# EAGLE board prototype (EAGLE 7.2.0)
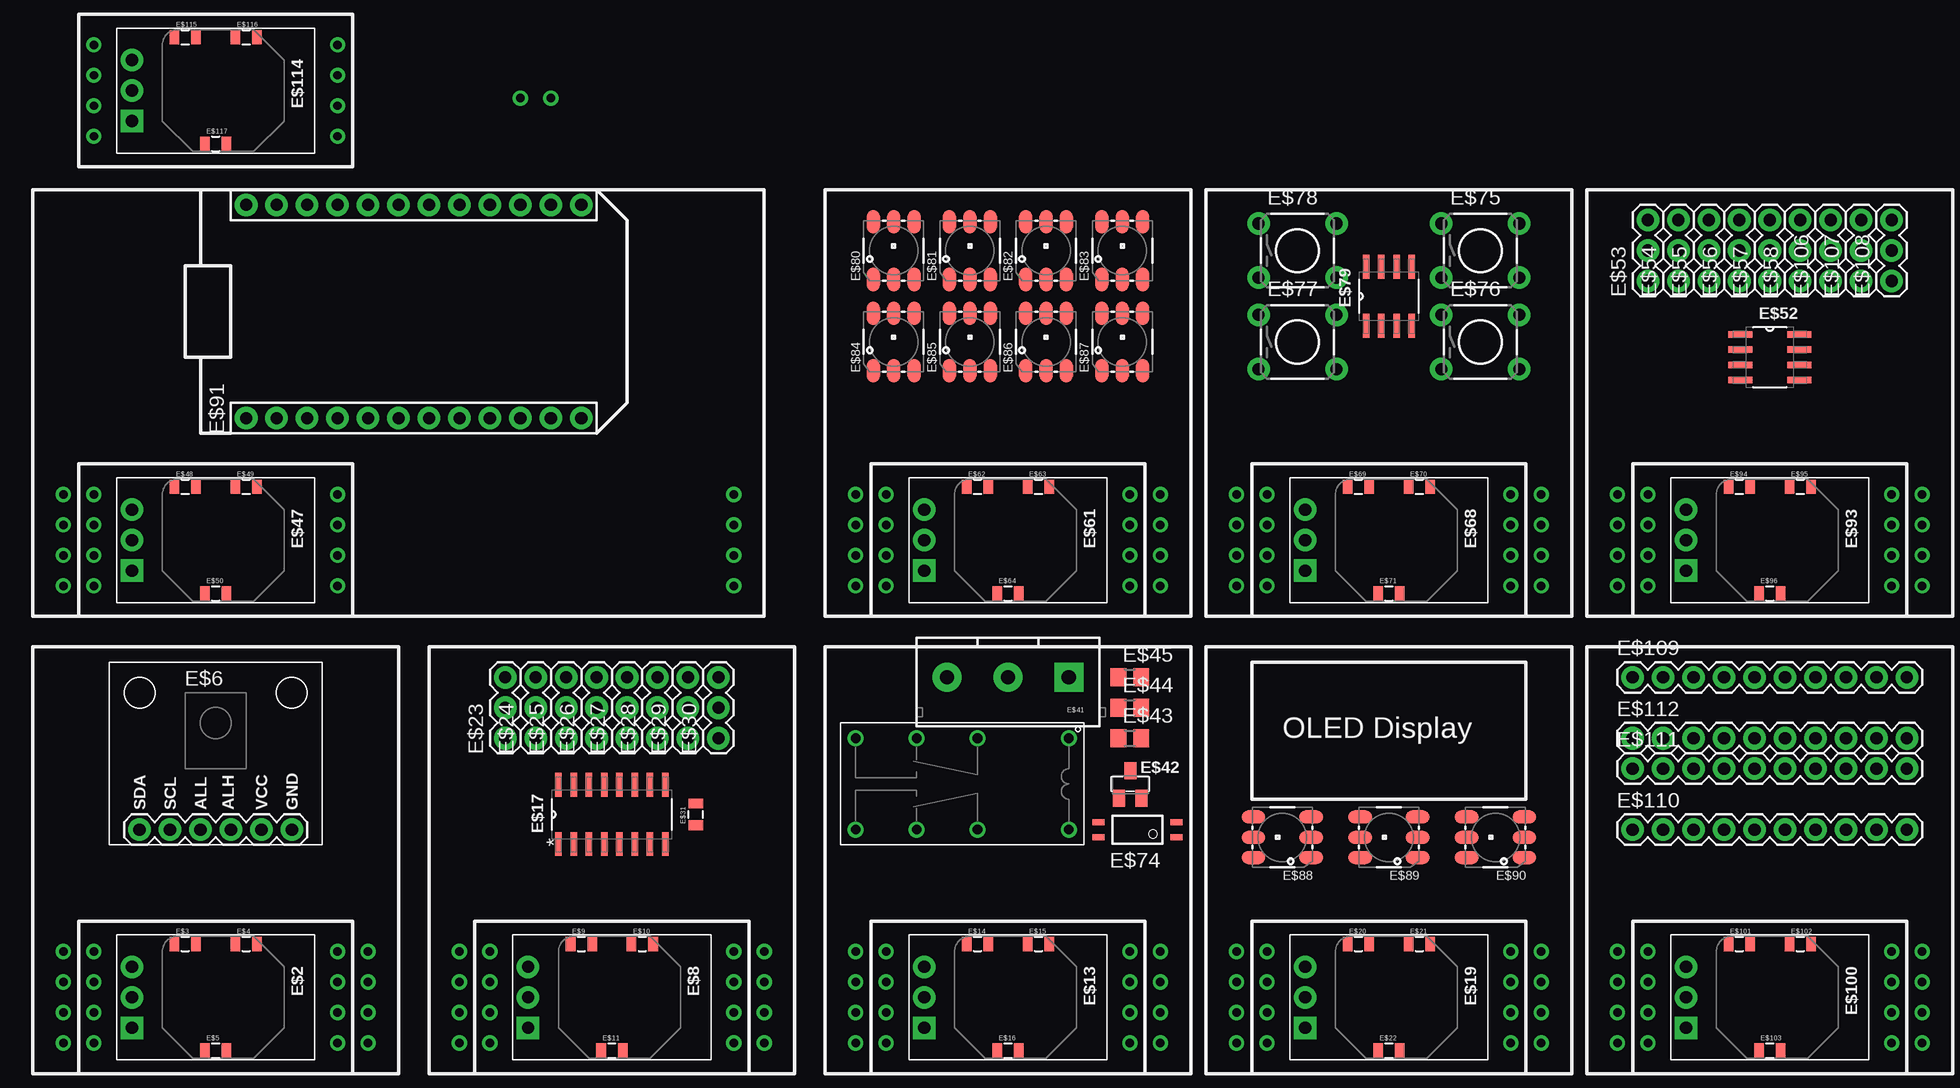
[diagram p0: board, top side]
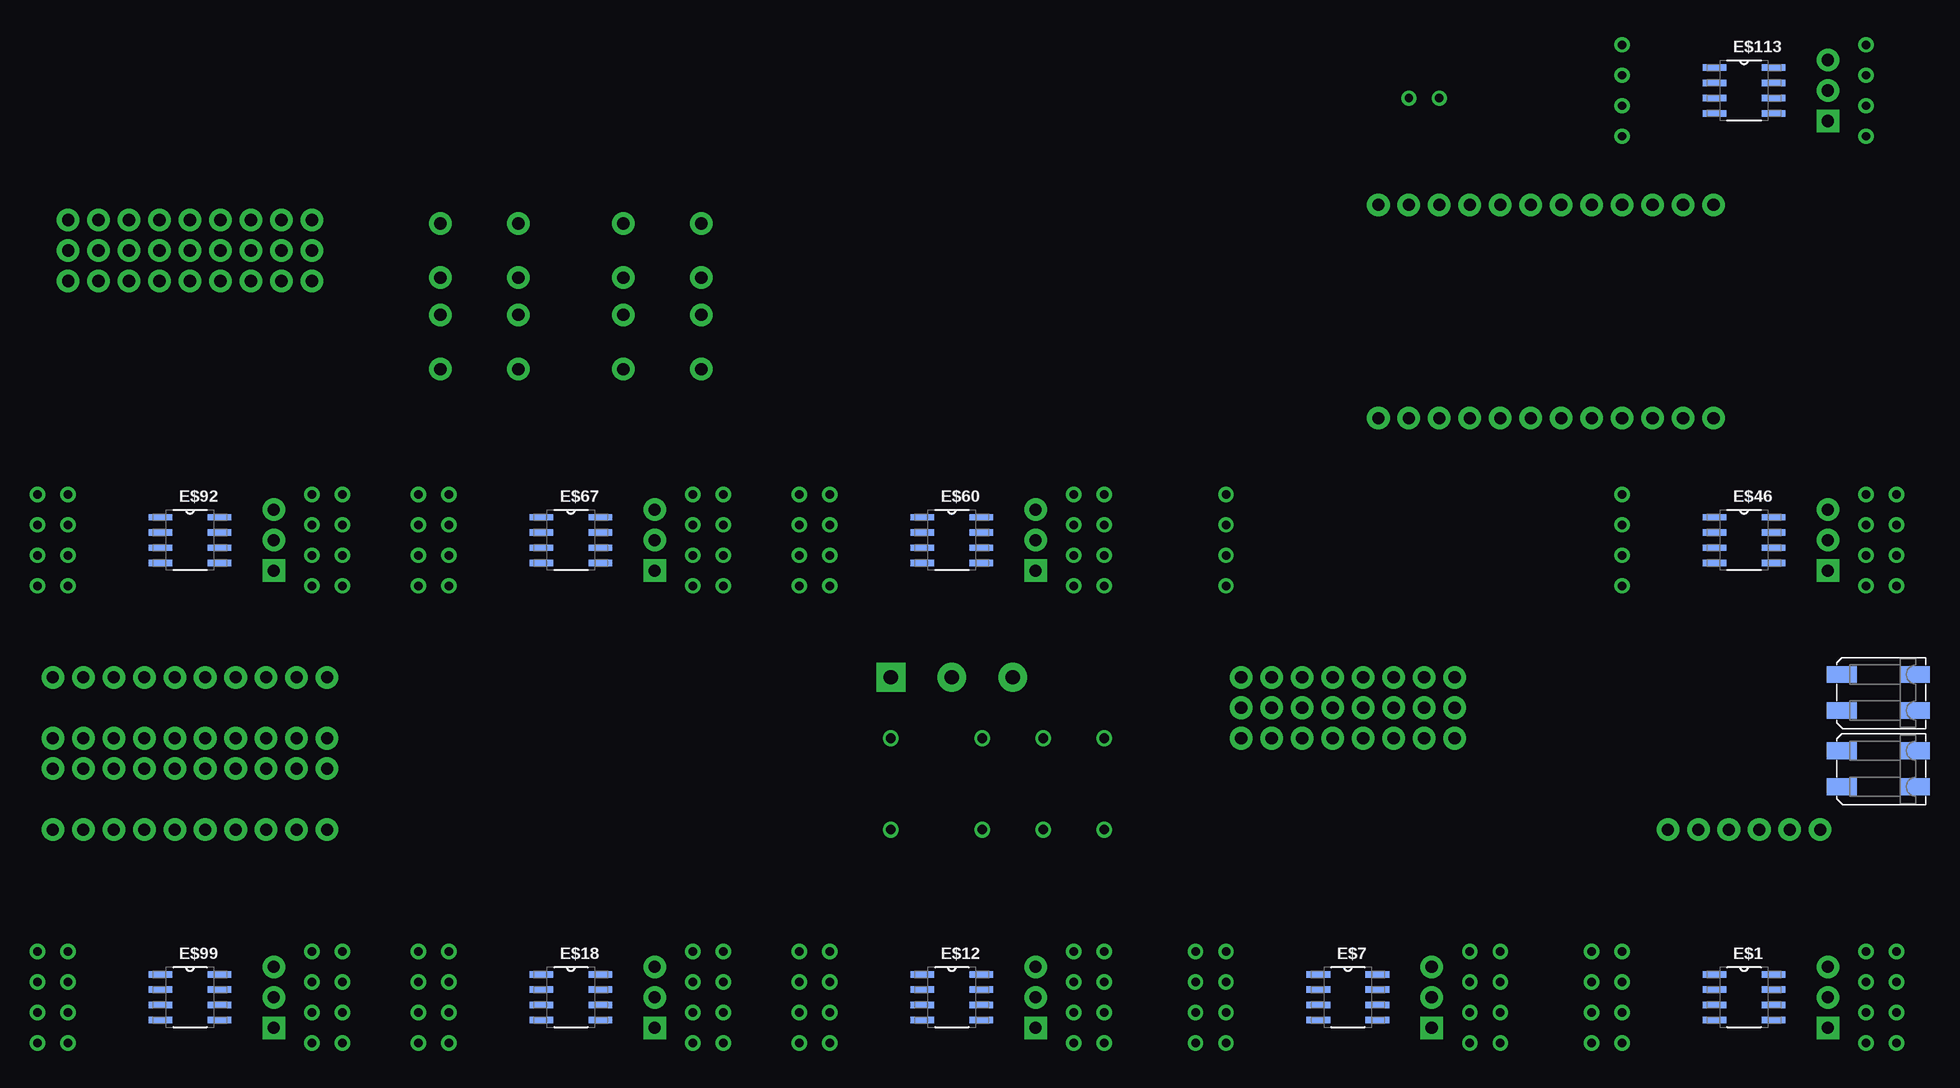
[diagram p1: board, bottom side, seen from below]

No outline drawn. Coordinates in mm, seen from the top.
Copper layers (1*16): Top 0.035mm / dielectric 1.5mm / Bottom 0.035mm
Design rules "default": minimum track width 10mil, minimum drill 24mil, track to track 8mil, track to pad 8mil, pad to pad 8mil, via to via 8mil, smd to smd 8mil, copper to edge 40mil, drill to drill 8mil, minimum pad ring 10mil, minimum via ring 8mil, stop-mask expansion 4mil, vias tented up to drill 0mil, thermal gap 10mil

## Footprints (pad centres in the part's own frame; a part is rotated, then mirrored left to right if it is on the bottom)
SOIC8 = smd 1.981 x 0.533: 1 -2.464,1.905; 2 -2.464,0.635; 3 -2.464,-0.635; 4 -2.464,-1.905; 5 2.464,-1.905; 6 2.464,-0.635; 7 2.464,0.635; 8 2.464,1.905
MURATA_REG_HOR = drill 1.016 pad 1.88 square: 1 2.54,0 | drill 1.016 pad 1.88: 2 0,0; 3 -2.54,0
0805 = smd 0.8 x 1.2: 1 -0.9,0; 2 0.9,0
SPARKFUN_HIH6130 = drill 1.016 pad 1.88: AL_H 1.27,0; AL_L -1.27,0; GND 6.35,0; SCL -3.81,0; SDA -6.35,0; VCC 3.81,0
SOIC16 = smd 1.981 x 0.533: 1 -2.464,4.445; 2 -2.464,3.175; 3 -2.464,1.905; 4 -2.464,0.635; 5 -2.464,-0.635; 6 -2.464,-1.905; 7 -2.464,-3.175; 8 -2.464,-4.445; 9 2.464,-4.445; 10 2.464,-3.175; 11 2.464,-1.905; 12 2.464,-0.635; 13 2.464,0.635; 14 2.464,1.905; 15 2.464,3.175; 16 2.464,4.445
1X03 = drill 1.016 pad 1.88: 1 0,0; 2 2.54,0; 3 5.08,0
DIP16-RELAY = drill 0.8: 1 -8.89,-3.81; 4 -1.27,-3.81; 6 3.81,-3.81; 8 8.89,-3.81; 9 8.89,3.81; 11 3.81,3.81; 13 -1.27,3.81; 16 -8.89,3.81
SCREWTERM_0.2X3 = drill 1.2 pad 2.413 square: 1 0,0 | drill 1.2 pad 2.413: 2 5.08,0; 3 10.16,0
SOT-23 = smd 1 x 1.4: 1 -0.92,-1.2; 2 0.98,-1.2; 3 0.03,1.1
R0805 = smd 1.3 x 1.5: 1 -0.95,0; 2 0.95,0
MINI-FLAT-4 = smd 1 x 0.5: 1 -3.24,0.635; 2 -3.24,-0.635; 3 3.24,-0.635; 4 3.24,0.635
TACTILE-PTH = drill 1.016 pad 1.88: 1 -3.251,2.261; 2 3.251,2.261; 3 -3.251,-2.261; 4 3.251,-2.261
LED-TRICOLOR-5050 = smd 2 x 1.1: 1 -2.4,1.7; 2 -2.4,0; 3 -2.4,-1.7; 4 2.4,-1.7; 5 2.4,0; 6 2.4,1.7
SPARK_CORE = drill 1.016 pad 1.88: 1 -8.89,13.97; 2 -8.89,11.43; 3 -8.89,8.89; 4 -8.89,6.35; 5 -8.89,3.81; 6 -8.89,1.27; 7 -8.89,-1.27; 8 -8.89,-3.81; 9 -8.89,-6.35; 10 -8.89,-8.89; 11 -8.89,-11.43; 12 -8.89,-13.97; 13 8.89,-13.97; 14 8.89,-11.43; 15 8.89,-8.89; 16 8.89,-6.35; 17 8.89,-3.81; 18 8.89,-1.27; 19 8.89,1.27; 20 8.89,3.81; 21 8.89,6.35; 22 8.89,8.89; 23 8.89,11.43; 24 8.89,13.97
1X10 = drill 1.016 pad 1.88: 1 0,0; 2 2.54,0; 3 5.08,0; 4 7.62,0; 5 10.16,0; 6 12.7,0; 7 15.24,0; 8 17.78,0; 9 20.32,0; 10 22.86,0
MOLEX_MINILITE_TRAP_2 = smd 2.5 x 1.4: 1 -3.3,1.5; 2 -3.3,-1.5; 3 2.8,1.5; 4 2.8,-1.5

## Placement (x,y rotation side)
E$1  [SOIC8]  15.24,6.35 0 bottom
E$2  [MURATA_REG_HOR]  8.26,6.35 270 top
E$3  [0805]  12.7,10.79 0 top
E$4  [0805]  17.78,10.79 0 top
E$5  [0805]  15.24,1.91 0 top
E$6  [SPARKFUN_HIH6130]  15.24,20.32 0 top
E$7  [SOIC8]  48.26,6.35 0 bottom
E$8  [MURATA_REG_HOR]  41.27,6.35 270 top
E$9  [0805]  45.72,10.79 0 top
E$10  [0805]  50.8,10.79 0 top
E$11  [0805]  48.26,1.91 0 top
E$12  [SOIC8]  81.28,6.35 0 bottom
E$13  [MURATA_REG_HOR]  74.3,6.35 270 top
E$14  [0805]  78.74,10.79 0 top
E$15  [0805]  83.82,10.79 0 top
E$16  [0805]  81.28,1.91 0 top
E$17  [SOIC16]  48.26,21.59 90 top
E$18  [SOIC8]  113.03,6.35 0 bottom
E$19  [MURATA_REG_HOR]  106.05,6.35 270 top
E$20  [0805]  110.49,10.79 0 top
E$21  [0805]  115.57,10.79 0 top
E$22  [0805]  113.03,1.91 0 top
E$23  [1X03]  39.37,27.94 90 top
E$24  [1X03]  41.91,27.94 90 top
E$25  [1X03]  44.45,27.94 90 top
E$26  [1X03]  46.99,27.94 90 top
E$27  [1X03]  49.53,27.94 90 top
E$28  [1X03]  52.07,27.94 90 top
E$29  [1X03]  54.61,27.94 90 top
E$30  [1X03]  57.15,27.94 90 top
E$31  [0805]  55.24,21.59 90 top
E$35  [DIP16-RELAY]  77.47,24.13 180 top
E$41  [SCREWTERM_0.2X3]  86.36,33.02 180 top
E$42  [SOT-23]  91.44,24.13 0 top
E$43  [R0805]  91.44,27.94 0 top
E$44  [R0805]  91.44,30.48 0 top
E$45  [R0805]  91.44,33.02 0 top
E$46  [SOIC8]  15.24,44.45 0 bottom
E$47  [MURATA_REG_HOR]  8.26,44.45 270 top
E$48  [0805]  12.7,48.9 0 top
E$49  [0805]  17.78,48.9 0 top
E$50  [0805]  15.24,40.01 0 top
E$52  [SOIC8]  144.78,59.69 0 top
E$53  [1X03]  134.62,66.04 90 top
E$54  [1X03]  137.16,66.04 90 top
E$55  [1X03]  139.7,66.04 90 top
E$56  [1X03]  142.24,66.04 90 top
E$57  [1X03]  144.78,66.04 90 top
E$58  [1X03]  147.32,66.04 90 top
E$60  [SOIC8]  81.28,44.45 0 bottom
E$61  [MURATA_REG_HOR]  74.3,44.45 270 top
E$62  [0805]  78.74,48.9 0 top
E$63  [0805]  83.82,48.9 0 top
E$64  [0805]  81.28,40.01 0 top
E$67  [SOIC8]  113.03,44.45 0 bottom
E$68  [MURATA_REG_HOR]  106.05,44.45 270 top
E$69  [0805]  110.49,48.9 0 top
E$70  [0805]  115.57,48.9 0 top
E$71  [0805]  113.03,40.01 0 top
E$74  [MINI-FLAT-4]  92.08,20.32 180 top
E$75  [TACTILE-PTH]  120.65,68.58 0 top
E$76  [TACTILE-PTH]  120.65,60.96 0 top
E$77  [TACTILE-PTH]  105.41,60.96 0 top
E$78  [TACTILE-PTH]  105.41,68.58 0 top
E$79  [SOIC8]  113.03,64.77 90 top
E$80  [LED-TRICOLOR-5050]  71.75,68.58 90 top
E$81  [LED-TRICOLOR-5050]  78.11,68.58 90 top
E$82  [LED-TRICOLOR-5050]  84.45,68.58 90 top
E$83  [LED-TRICOLOR-5050]  90.81,68.58 90 top
E$84  [LED-TRICOLOR-5050]  71.75,60.96 90 top
E$85  [LED-TRICOLOR-5050]  78.11,60.96 90 top
E$86  [LED-TRICOLOR-5050]  84.45,60.96 90 top
E$87  [LED-TRICOLOR-5050]  90.81,60.96 90 top
E$88  [LED-TRICOLOR-5050]  104.14,19.68 180 top
E$89  [LED-TRICOLOR-5050]  113.03,19.68 180 top
E$90  [LED-TRICOLOR-5050]  121.92,19.68 180 top
E$91  [SPARK_CORE]  31.75,63.5 90 top
E$92  [SOIC8]  144.78,44.45 0 bottom
E$93  [MURATA_REG_HOR]  137.79,44.45 270 top
E$94  [0805]  142.24,48.9 0 top
E$95  [0805]  147.32,48.9 0 top
E$96  [0805]  144.78,40.01 0 top
E$99  [SOIC8]  144.78,6.35 0 bottom
E$100  [MURATA_REG_HOR]  137.79,6.35 270 top
E$101  [0805]  142.24,10.79 0 top
E$102  [0805]  147.32,10.79 0 top
E$103  [0805]  144.78,1.91 0 top
E$106  [1X03]  149.86,66.04 90 top
E$107  [1X03]  152.4,66.04 90 top
E$108  [1X03]  154.94,66.04 90 top
E$109  [1X10]  133.35,33.02 0 top
E$110  [1X10]  133.35,20.32 0 top
E$111  [1X10]  133.35,25.4 0 top
E$112  [1X10]  133.35,27.94 0 top
E$113  [SOIC8]  15.24,81.92 0 bottom
E$114  [MURATA_REG_HOR]  8.26,81.92 270 top
E$115  [0805]  12.7,86.36 0 top
E$116  [0805]  17.78,86.36 0 top
E$117  [0805]  15.24,77.47 0 top
E$118  [MOLEX_MINILITE_TRAP_2]  3.81,25.4 0 bottom
E$119  [MOLEX_MINILITE_TRAP_2]  3.81,31.75 0 bottom

## Library data of the parts
E$1 E$2 E$6-E$8 E$12 E$13 E$17-E$19 E$35 E$41 E$42 E$46 E$47 E$52 E$60 E$61 E$67 E$68 E$79 E$92 E$93 E$99 E$100 E$113 E$114 E$118 E$119 = Puffin
E$3-E$5 E$9-E$11 E$14-E$16 E$20-E$22 E$31 E$48-E$50 E$62-E$64 E$69-E$71 E$94-E$96 E$101-E$103 E$115-E$117 = SparkFun-Resistors
E$23-E$30 E$53-E$58 E$106-E$112 = SparkFun-Connectors
E$43-E$45 = eagle-ltspice
E$74 = optocoupler
E$75-E$78 = SparkFun-Electromechanical
E$80-E$90 = SparkFun-LED
E$91 = Spark

## Tracks (layer width: path | path; a pad name or v marks a point on that pad's centre or on a via)
S$1  (via drill 0.7 pad 1.27)
  other vias: 25.4,10.16
S$2  (via drill 0.7 pad 1.27)
  other vias: 25.4,7.62
S$3  (via drill 0.7 pad 1.27)
  other vias: 25.4,5.08
S$4  (via drill 0.7 pad 1.27)
  other vias: 5.08,10.16 2.54,10.16
S$5  (via drill 0.7 pad 1.27)
  other vias: 5.08,7.62
S$6  (via drill 0.7 pad 1.27)
  other vias: 5.08,5.08
S$7  (via drill 0.7 pad 1.27)
  other vias: 5.08,2.54
S$8  (via drill 0.7 pad 1.27)
  other vias: 25.4,2.54
S$9  (via drill 0.7 pad 1.27)
  other vias: 2.54,7.62
S$10  (via drill 0.7 pad 1.27)
  other vias: 2.54,5.08
S$11  (via drill 0.7 pad 1.27)
  other vias: 2.54,2.54
S$12  (via drill 0.7 pad 1.27)
  other vias: 27.94,10.16
S$13  (via drill 0.7 pad 1.27)
  other vias: 27.94,7.62
S$14  (via drill 0.7 pad 1.27)
  other vias: 27.94,5.08
S$15  (via drill 0.7 pad 1.27)
  other vias: 27.94,2.54
S$16  (via drill 0.7 pad 1.27)
  other vias: 38.1,10.16 35.56,10.16
S$17  (via drill 0.7 pad 1.27)
  other vias: 38.1,7.62
S$18  (via drill 0.7 pad 1.27)
  other vias: 38.1,5.08
S$19  (via drill 0.7 pad 1.27)
  other vias: 38.1,2.54
S$20  (via drill 0.7 pad 1.27)
  other vias: 58.42,10.16
S$21  (via drill 0.7 pad 1.27)
  other vias: 58.42,7.62
S$22  (via drill 0.7 pad 1.27)
  other vias: 58.42,5.08
S$23  (via drill 0.7 pad 1.27)
  other vias: 58.42,2.54
S$24  (via drill 0.7 pad 1.27)
  other vias: 35.56,7.62
S$25  (via drill 0.7 pad 1.27)
  other vias: 35.56,5.08
S$26  (via drill 0.7 pad 1.27)
  other vias: 35.56,2.54
S$27  (via drill 0.7 pad 1.27)
  other vias: 60.96,10.16
S$28  (via drill 0.7 pad 1.27)
  other vias: 60.96,7.62
S$29  (via drill 0.7 pad 1.27)
  other vias: 60.96,5.08
S$30  (via drill 0.7 pad 1.27)
  other vias: 60.96,2.54
S$31  (via drill 0.7 pad 1.27)
  other vias: 71.12,10.16 68.58,10.16
S$32  (via drill 0.7 pad 1.27)
  other vias: 71.12,7.62
S$33  (via drill 0.7 pad 1.27)
  other vias: 71.12,5.08
S$34  (via drill 0.7 pad 1.27)
  other vias: 71.12,2.54
S$35  (via drill 0.7 pad 1.27)
  other vias: 91.44,10.16
S$36  (via drill 0.7 pad 1.27)
  other vias: 91.44,7.62
S$37  (via drill 0.7 pad 1.27)
  other vias: 91.44,5.08
S$38  (via drill 0.7 pad 1.27)
  other vias: 91.44,2.54
S$39  (via drill 0.7 pad 1.27)
  other vias: 68.58,7.62
S$40  (via drill 0.7 pad 1.27)
  other vias: 68.58,5.08
S$41  (via drill 0.7 pad 1.27)
  other vias: 68.58,2.54
S$42  (via drill 0.7 pad 1.27)
  other vias: 93.98,10.16
S$43  (via drill 0.7 pad 1.27)
  other vias: 93.98,7.62
S$44  (via drill 0.7 pad 1.27)
  other vias: 93.98,5.08
S$45  (via drill 0.7 pad 1.27)
  other vias: 93.98,2.54
S$46  (via drill 0.7 pad 1.27)
  other vias: 102.87,10.16 100.33,10.16
S$47  (via drill 0.7 pad 1.27)
  other vias: 102.87,7.62
S$48  (via drill 0.7 pad 1.27)
  other vias: 102.87,5.08
S$49  (via drill 0.7 pad 1.27)
  other vias: 102.87,2.54
S$50  (via drill 0.7 pad 1.27)
  other vias: 123.19,10.16
S$51  (via drill 0.7 pad 1.27)
  other vias: 123.19,7.62
S$52  (via drill 0.7 pad 1.27)
  other vias: 123.19,5.08
S$53  (via drill 0.7 pad 1.27)
  other vias: 123.19,2.54
S$54  (via drill 0.7 pad 1.27)
  other vias: 100.33,7.62
S$55  (via drill 0.7 pad 1.27)
  other vias: 100.33,5.08
S$56  (via drill 0.7 pad 1.27)
  other vias: 100.33,2.54
S$57  (via drill 0.7 pad 1.27)
  other vias: 125.73,10.16
S$58  (via drill 0.7 pad 1.27)
  other vias: 125.73,7.62
S$59  (via drill 0.7 pad 1.27)
  other vias: 125.73,5.08
S$60  (via drill 0.7 pad 1.27)
  other vias: 125.73,2.54
S$61  (via drill 0.7 pad 1.27)
  other vias: 5.08,48.26 2.54,48.26
S$62  (via drill 0.7 pad 1.27)
  other vias: 5.08,45.72
S$63  (via drill 0.7 pad 1.27)
  other vias: 5.08,43.18
S$64  (via drill 0.7 pad 1.27)
  other vias: 5.08,40.64
S$65  (via drill 0.7 pad 1.27)
  other vias: 25.4,48.26
S$66  (via drill 0.7 pad 1.27)
  other vias: 25.4,45.72
S$67  (via drill 0.7 pad 1.27)
  other vias: 25.4,43.18
S$68  (via drill 0.7 pad 1.27)
  other vias: 25.4,40.64
S$69  (via drill 0.7 pad 1.27)
  other vias: 2.54,45.72
S$70  (via drill 0.7 pad 1.27)
  other vias: 2.54,43.18
S$71  (via drill 0.7 pad 1.27)
  other vias: 2.54,40.64
S$72  (via drill 0.7 pad 1.27)
  other vias: 5.08,85.72
S$73  (via drill 0.7 pad 1.27)
  other vias: 5.08,83.19
S$74  (via drill 0.7 pad 1.27)
  other vias: 5.08,80.64
S$75  (via drill 0.7 pad 1.27)
  other vias: 5.08,78.11
S$76  (via drill 0.7 pad 1.27)
  other vias: 43.18,81.28 40.64,81.28
S$77  (via drill 0.7 pad 1.27)
  other vias: 25.4,85.72
S$78  (via drill 0.7 pad 1.27)
  other vias: 25.4,83.19
S$79  (via drill 0.7 pad 1.27)
  other vias: 25.4,80.64
S$80  (via drill 0.7 pad 1.27)
  other vias: 25.4,78.11
S$87  (via drill 0.7 pad 1.27)
  other vias: 58.42,48.26
S$88  (via drill 0.7 pad 1.27)
  other vias: 58.42,45.72
S$89  (via drill 0.7 pad 1.27)
  other vias: 58.42,43.18
S$90  (via drill 0.7 pad 1.27)
  other vias: 58.42,40.64
S$91  (via drill 0.7 pad 1.27)
  other vias: 71.12,48.26 68.58,48.26
S$92  (via drill 0.7 pad 1.27)
  other vias: 71.12,45.72
S$93  (via drill 0.7 pad 1.27)
  other vias: 71.12,43.18
S$94  (via drill 0.7 pad 1.27)
  other vias: 71.12,40.64
S$95  (via drill 0.7 pad 1.27)
  other vias: 91.44,48.26
S$96  (via drill 0.7 pad 1.27)
  other vias: 91.44,45.72
S$97  (via drill 0.7 pad 1.27)
  other vias: 91.44,43.18
S$98  (via drill 0.7 pad 1.27)
  other vias: 91.44,40.64
S$99  (via drill 0.7 pad 1.27)
  other vias: 68.58,45.72
S$100  (via drill 0.7 pad 1.27)
  other vias: 68.58,43.18
S$101  (via drill 0.7 pad 1.27)
  other vias: 68.58,40.64
S$102  (via drill 0.7 pad 1.27)
  other vias: 93.98,48.26
S$103  (via drill 0.7 pad 1.27)
  other vias: 93.98,45.72
S$104  (via drill 0.7 pad 1.27)
  other vias: 93.98,43.18
S$105  (via drill 0.7 pad 1.27)
  other vias: 93.98,40.64
S$106  (via drill 0.7 pad 1.27)
  other vias: 102.87,48.26 100.33,48.26
S$107  (via drill 0.7 pad 1.27)
  other vias: 102.87,45.72
S$108  (via drill 0.7 pad 1.27)
  other vias: 102.87,43.18
S$109  (via drill 0.7 pad 1.27)
  other vias: 102.87,40.64
S$110  (via drill 0.7 pad 1.27)
  other vias: 123.19,48.26
S$111  (via drill 0.7 pad 1.27)
  other vias: 123.19,45.72
S$112  (via drill 0.7 pad 1.27)
  other vias: 123.19,43.18
S$113  (via drill 0.7 pad 1.27)
  other vias: 123.19,40.64
S$114  (via drill 0.7 pad 1.27)
  other vias: 100.33,45.72
S$115  (via drill 0.7 pad 1.27)
  other vias: 100.33,43.18
S$116  (via drill 0.7 pad 1.27)
  other vias: 100.33,40.64
S$117  (via drill 0.7 pad 1.27)
  other vias: 125.73,48.26
S$118  (via drill 0.7 pad 1.27)
  other vias: 125.73,45.72
S$119  (via drill 0.7 pad 1.27)
  other vias: 125.73,43.18
S$120  (via drill 0.7 pad 1.27)
  other vias: 125.73,40.64
S$121  (via drill 0.7 pad 1.27)
  other vias: 134.62,48.26 132.08,48.26
S$122  (via drill 0.7 pad 1.27)
  other vias: 134.62,45.72
S$123  (via drill 0.7 pad 1.27)
  other vias: 134.62,43.18
S$124  (via drill 0.7 pad 1.27)
  other vias: 134.62,40.64
S$125  (via drill 0.7 pad 1.27)
  other vias: 154.94,48.26
S$126  (via drill 0.7 pad 1.27)
  other vias: 154.94,45.72
S$127  (via drill 0.7 pad 1.27)
  other vias: 154.94,43.18
S$128  (via drill 0.7 pad 1.27)
  other vias: 154.94,40.64
S$129  (via drill 0.7 pad 1.27)
  other vias: 132.08,45.72
S$130  (via drill 0.7 pad 1.27)
  other vias: 132.08,43.18
S$131  (via drill 0.7 pad 1.27)
  other vias: 132.08,40.64
S$132  (via drill 0.7 pad 1.27)
  other vias: 157.48,48.26
S$133  (via drill 0.7 pad 1.27)
  other vias: 157.48,45.72
S$134  (via drill 0.7 pad 1.27)
  other vias: 157.48,43.18
S$135  (via drill 0.7 pad 1.27)
  other vias: 157.48,40.64
S$136  (via drill 0.7 pad 1.27)
  other vias: 134.62,10.16 132.08,10.16
S$137  (via drill 0.7 pad 1.27)
  other vias: 134.62,7.62
S$138  (via drill 0.7 pad 1.27)
  other vias: 134.62,5.08
S$139  (via drill 0.7 pad 1.27)
  other vias: 134.62,2.54
S$140  (via drill 0.7 pad 1.27)
  other vias: 154.94,10.16
S$141  (via drill 0.7 pad 1.27)
  other vias: 154.94,7.62
S$142  (via drill 0.7 pad 1.27)
  other vias: 154.94,5.08
S$143  (via drill 0.7 pad 1.27)
  other vias: 154.94,2.54
S$144  (via drill 0.7 pad 1.27)
  other vias: 132.08,7.62
S$145  (via drill 0.7 pad 1.27)
  other vias: 132.08,5.08
S$146  (via drill 0.7 pad 1.27)
  other vias: 132.08,2.54
S$147  (via drill 0.7 pad 1.27)
  other vias: 157.48,10.16
S$148  (via drill 0.7 pad 1.27)
  other vias: 157.48,7.62
S$149  (via drill 0.7 pad 1.27)
  other vias: 157.48,5.08
S$150  (via drill 0.7 pad 1.27)
  other vias: 157.48,2.54

## Text on the board
tPlace: OLED Display